# Altium PCB LV1.PCBDOC (part 1 of 2)
Units mm, origin at the board's own origin, x right, y up, seen from the top; angles counter-clockwise.
Board outline 220.06 x 100 mm, 4 copper layers (Component Side, Signal Layer 1, Signal Layer 2, Bottom Layer), stack 0.905 mm thick; 203 components, 130 nets, 643 pads, 1043 vias.
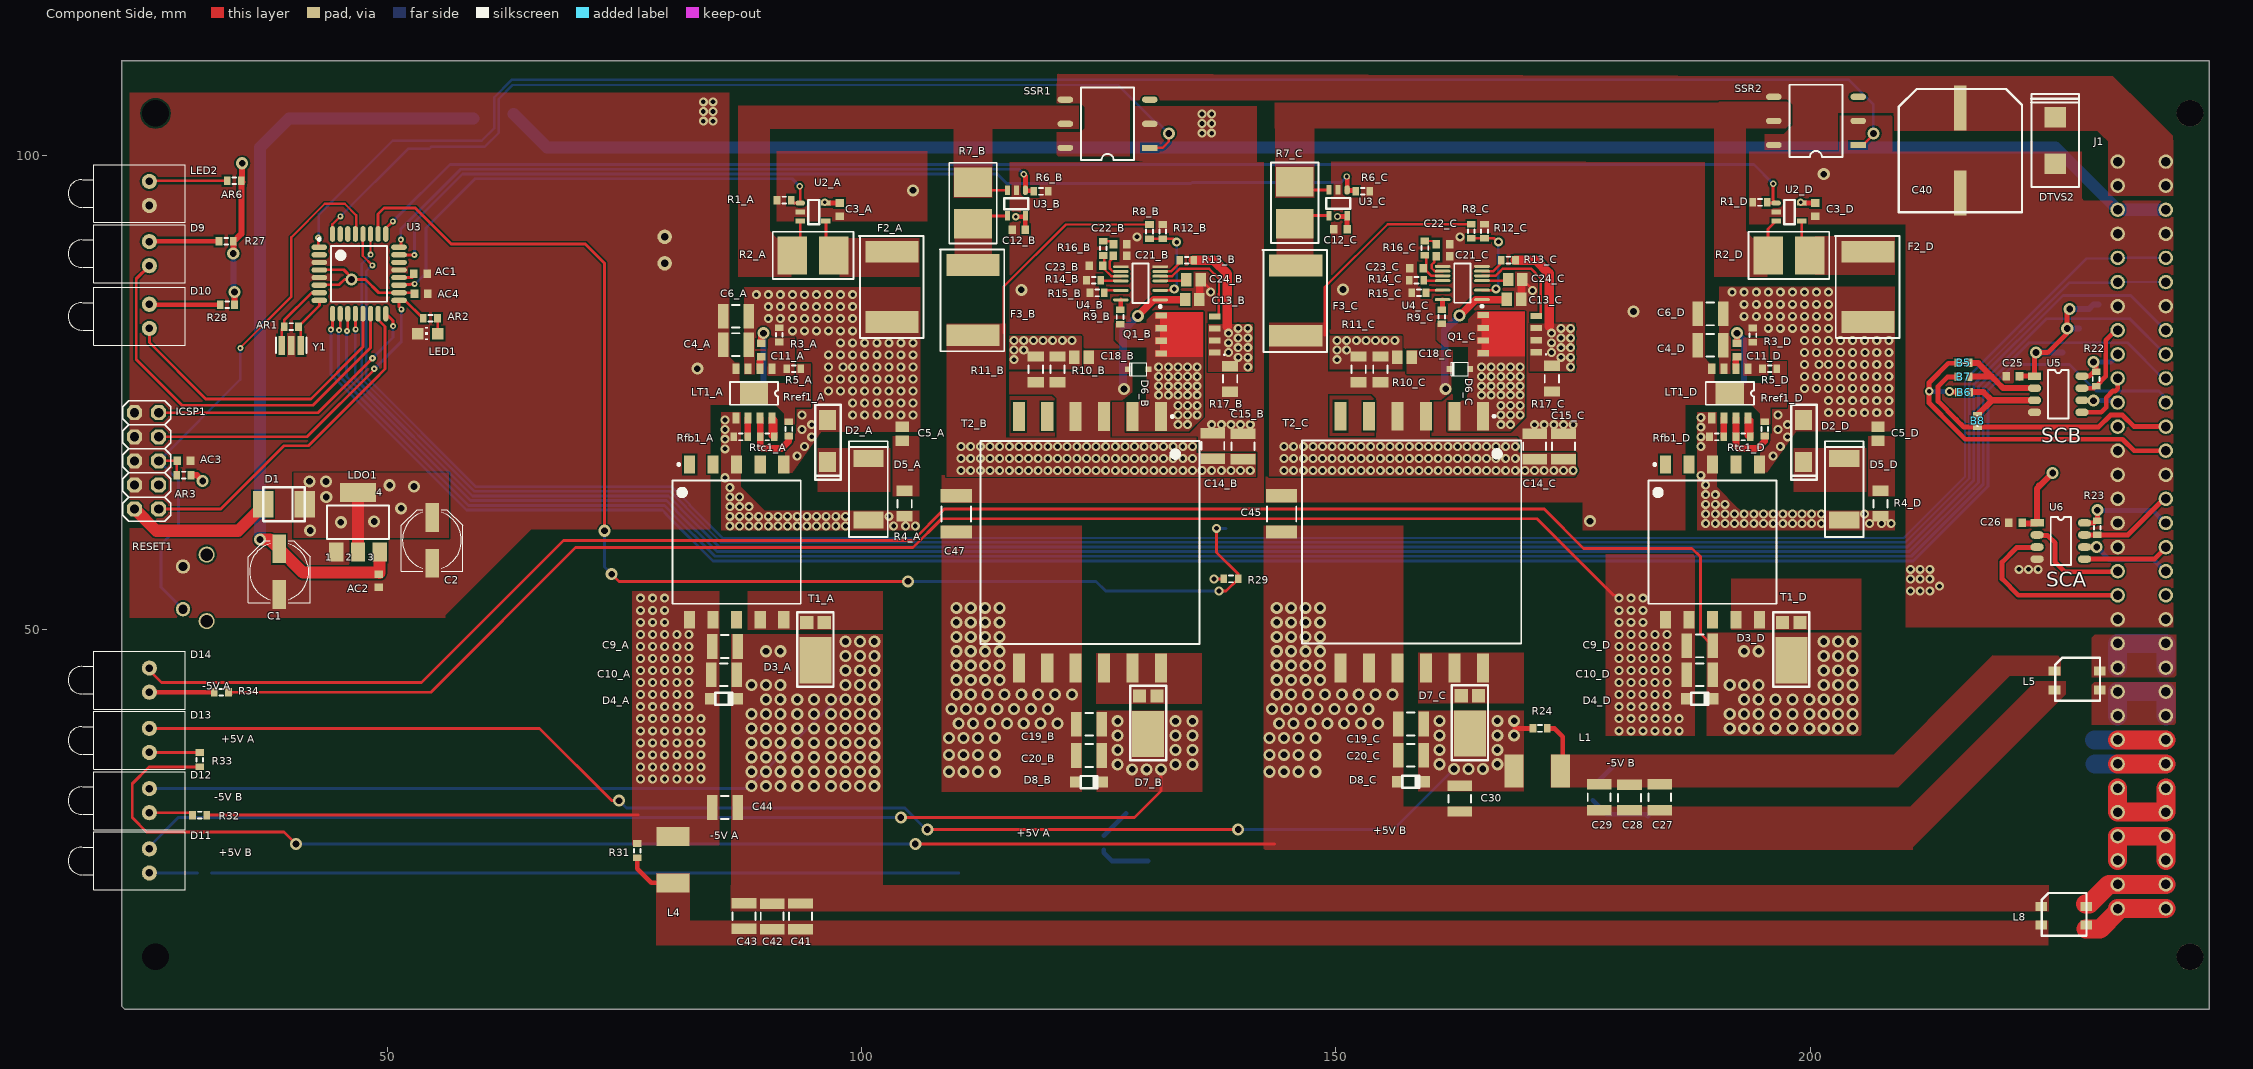
[diagram p0: Component Side view]
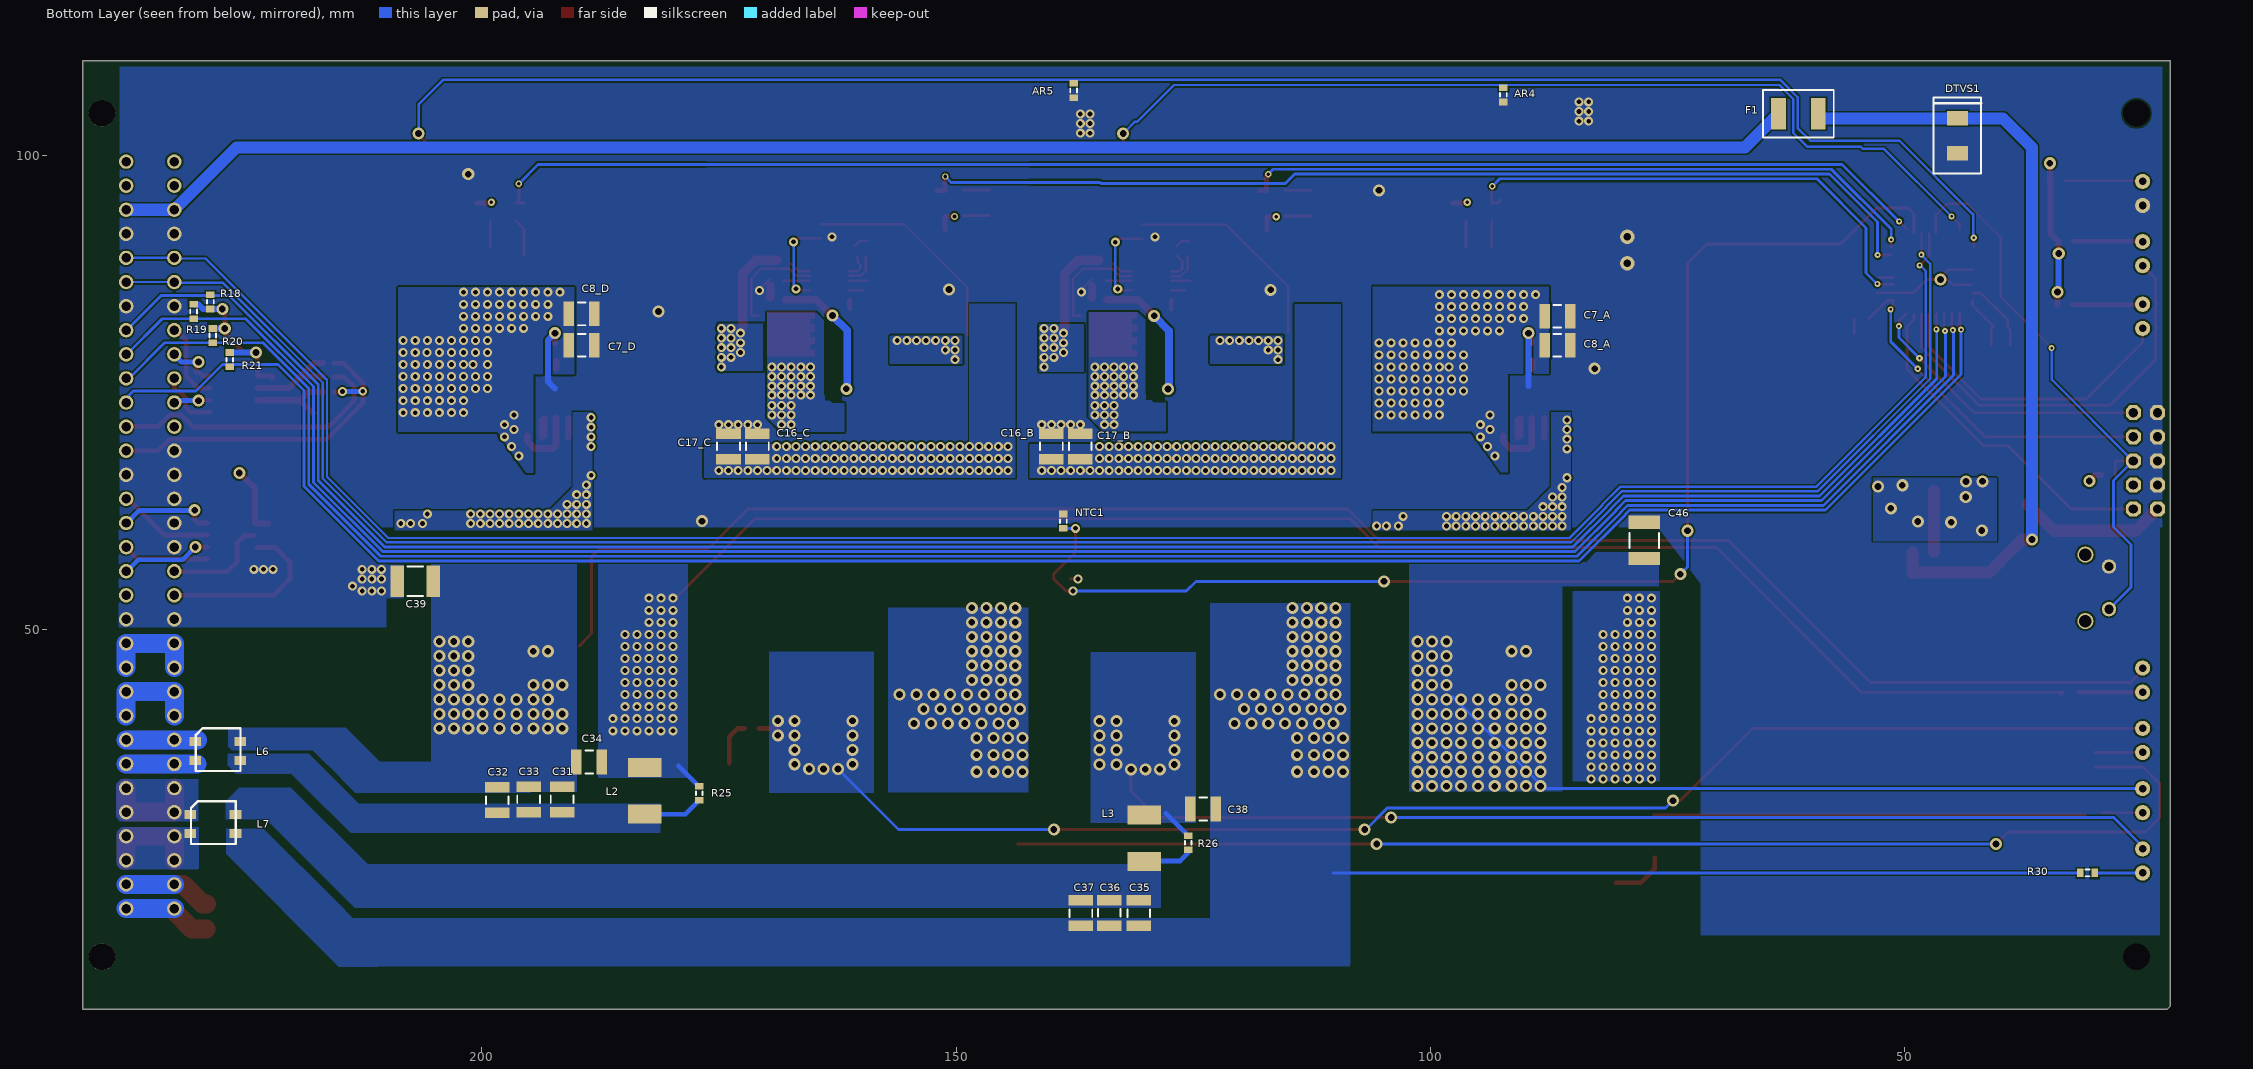
[diagram p1: Bottom Layer view, seen from below]
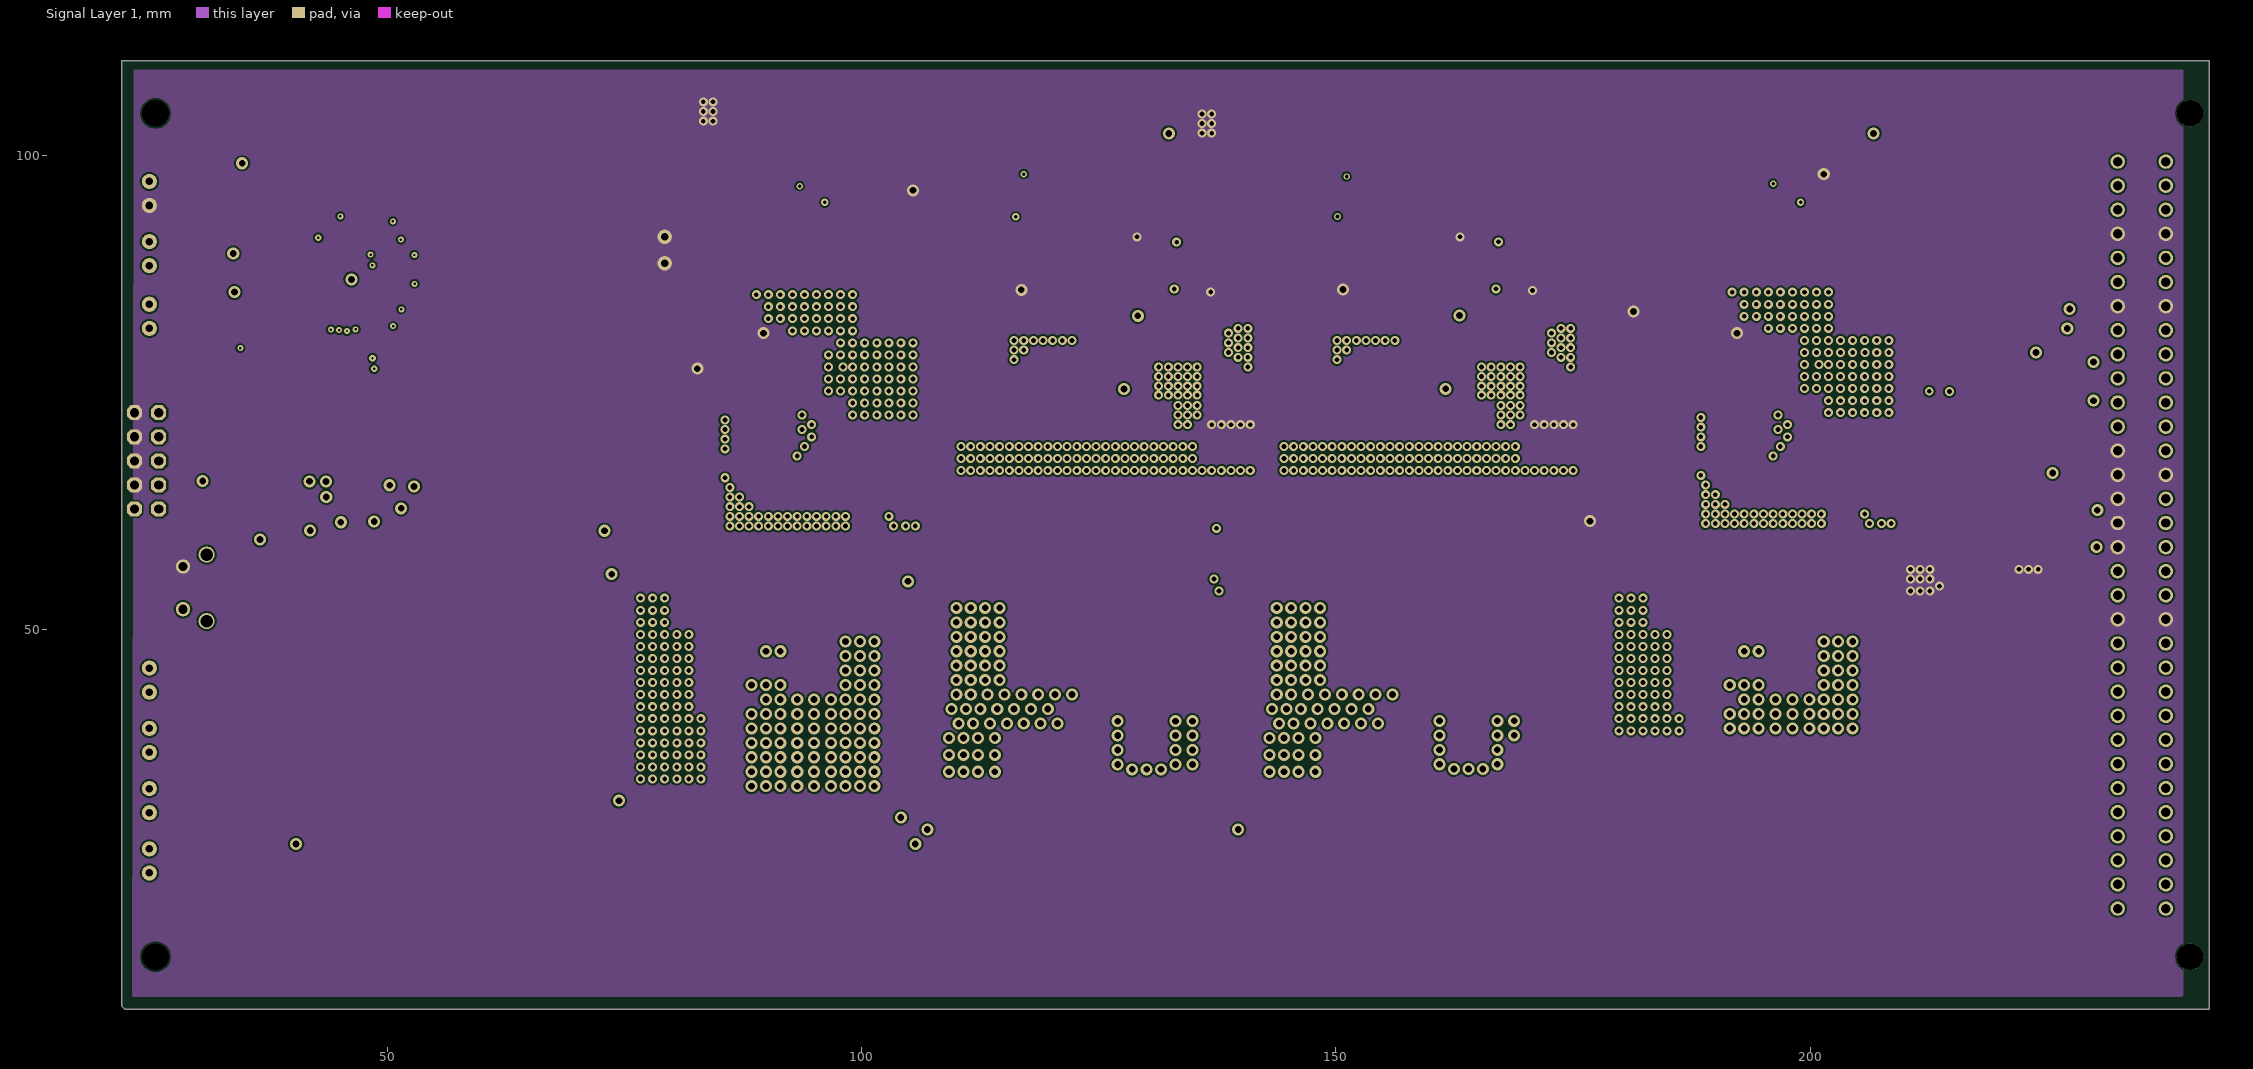
[diagram p2: Signal Layer 1]
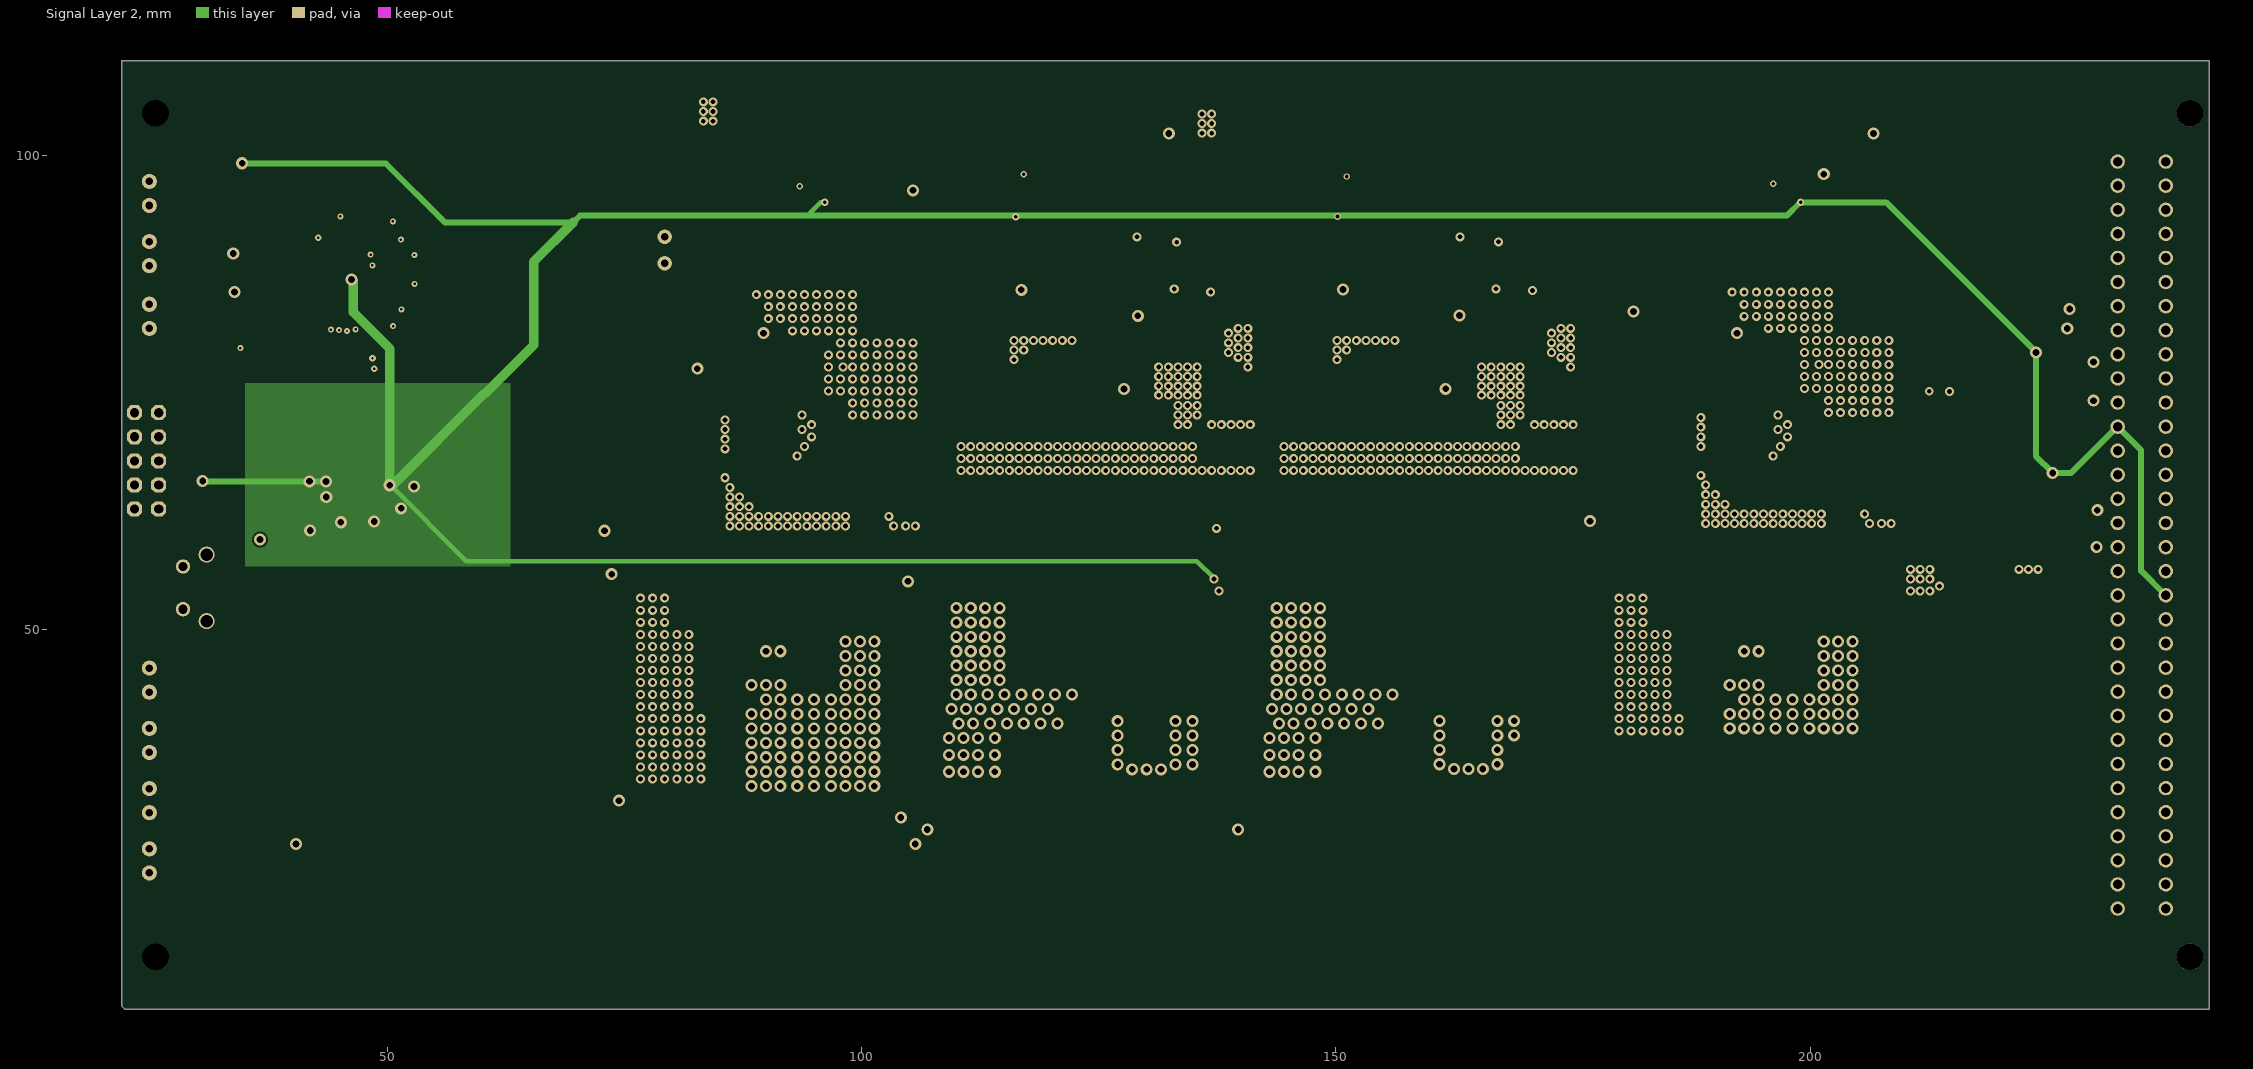
[diagram p3: Signal Layer 2]

## Layer stack, top to bottom
Top Solder: solder mask 0.0102, Solder Resist, Dk 3.5
Component Side: signal copper 0.0356
Dielectric 1: core 0.254, FR-4, Dk 4.2
Signal Layer 1: signal copper 0.036
Dielectric 3: core 0.254, Dk 4.2
Signal Layer 2: signal copper 0.036
Dielectric 4: core 0.254, Dk 4.2
Bottom Layer: signal copper 0.0356
Solder Side: solder mask 0.0102, Solder Resist, Dk 3.5

## Board outline
242.062,110 22.018,110 22,109.982 22,10.414 22,10.352 22.352,10 242.062,10

## Design rules (kind name [scope] priority, off if disabled: settings)
Clearance [InNamedPolygon('GNDtop')] p1: gap=0.2
Clearance Clearance_2 [InNamedPolygon('GNDbottom')] p2: gap=0.2
Clearance Clearance_1 [All] p3: gap=0.2
FabricationTestPointUsage TestPointUsage [All] p1: valid=0 allowmultiple=FALSE
FabricationTestpoint Testpoint [All] p1: side=3 testpointundercomponent=TRUE minsize=1.016 maxsize=2.54 preferedsize=1.524 minholesize=0.508 maxholesize=1.016 preferedholesize=0.813 testpointgrid=0.025 allowsidetop=TRUE allowsidebottom=TRUE usegrid=TRUE gridtolerance=0
PlaneClearance [All] p1: clearance=0.254
PlaneConnect [InNet('GND')] p1: planeconnectstyle=Direct reliefexpansion=0.508 reliefentries=4 reliefconductorwidth=0.254 reliefairgap=0.254
PlaneConnect PlaneConnect_1 [All] p2: planeconnectstyle=Relief reliefexpansion=0.508 reliefentries=4 reliefconductorwidth=0.254 reliefairgap=0.254
PolygonConnect [All] p1: connectstyle=Direct reliefconductorwidth=0.254 reliefentries=4 polygonreliefangle="90 Angle" airgapwidth=0.254
RoomDefinition U_controller [InComponentClass('U_controller')] p1: confinementstyle=ConfineIn formatcopy=TRUE lockcomponents=FALSE outline 93.98,48.768 93.98,110.998 13.716,110.998 13.716,48.768
RoutingVias [All] p1: holewidth=0.254 width=0.508 viastyle="Through Hole" minholewidth=0.254 minwidth=0.508 maxholewidth=0.711 maxwidth=1.27
SilkToSolderMaskClearance SilkscreenOverComponentPads [IsPad] p1: minsilkscreentomaskgap=0.254 clearancetoexposedcopper=TRUE
SolderMaskExpansion [All] p1: expansion=0.051
Width Width_1 [InNet('ISENSE_2') OR InNet('ISENSE_1') OR InNet('NEGISENSE_2') OR InNet('NEGISENSE_1') OR InNet('L_OUT+') OR InNet('L_OUT-') OR InNet('NEGL_OUT+') OR InNet('NEGL_OUT-') OR InNet('SW')] p1: maxlimit=2 minlimit=0.254 preferedwidth=1 midlayer1_maxwidth=0.254 midlayer1_prefwidth=0.254 minimp=50.000000 maximp=50.000000 favimp=50.000000
Width [All] p2: maxlimit=2 minlimit=0.254 preferedwidth=0.254 minimp=50.000000 maximp=50.000000 favimp=50.000000
25 further rules are at their usual default settings.

## Classes and differential pairs
channel class LV2: B C
component class C: C12_C C13_C C14_C C15_C C16_C C17_C C18_C C19_C C20_C C21_C C22 C22_C C23 C23_C C24 C24_C C63 C64 C69 D6_C D7_C D8_C D15 D16 D17 F3_C F5 Q1_C Q2 R6_C R7_C R8_C R9_C R10_C R11_C R12_C R13_C R14_C R15_C R16 R16_C R17 R17_C Rsense3 T2_C T3 U3_C U4 U4_C
component class B: C12_B C13_B C14_B C15_B C16_B C17_B C18_B C19_B C20_B C21_B C22_B C23_B C24_B C48 C50 C52 C53 C55 C56 C58 C59 C62 C65 C66 D6_B D7_B D8_B F2 F3_B Q1 Q1_B Q2 R5 R6 R6_B R7 R7_B R8 R8_B R9 R9_B R10 R10_B R11 R11_B R12 R12_B R13 R13_B R14 R14_B R15 R15_B R16_B R17_B Rsense2 T2 T2_B U3_B U4_B U7 U9
component class U_controller: AC1 AC2 AC3 AC4 AR1 AR2 AR3 AR4 AR5 AR6 C1 C2 C49 C50 D1 D7 DTVS1 F1 F4 F5 ICSP1 LDO1 LED1 LED2 R_pu1 R_pu3 RESET1 RLED1 U3 U7 U9 Y1
component class D: C3_D C4_D C5_D C6_D C7_D C8_D C9_D C10_D C11_D C60 C61 D2_D D3_D D4_D D5_D D15 D16 D17 D18 D19 D20 D21 F2_D F4 LT1_D LT2 Q4 R1_D R2_D R3_D R4_D R5_D R8 R17 Rfb1_D Rfb2 Rref1_D Rref2 Rsense3 Rsense4 Rtc1_D Rtc2 T1_D T3 T4 U2_D
component class A: C3_A C4_A C5_A C6_A C7_A C8_A C9_A C10_A C11_A C51 C67 C68 D2_A D3_A D4_A D5_A D7 D8 F2_A LT1 LT1_A R1_A R2_A R3 R3_A R4 R4_A R5_A R7 Rfb1 Rfb1_A Rref1 Rref1_A Rsense1 Rsense2 Rtc1 Rtc1_A T1 T1_A U2_A
channel class LV1: A B C D
component class Top: *1 B5 B6 B7 B8 C22 C25 C26 C27 C28 C29 C30 C31 C32 C33 C34 C35 C36 C37 C38 C39 C40 C41 C42 C43 C44 C45 C46 C47 C48 C49 C50 C51 C52 C53 C54 C55 C56 C57 C58 C59 C62 C69 D9 D10 D11 D12 D13 D14 DTVS2 J1 L1 L2 L3 L4 L5 L6 L7 L8 NTC1 R18 R19 R20 R21 R22 R23 R24 R25 R26 R27 R28 R29 R30 R31 R32 R33 R34 R_LED3 R_NTC1 RADRS4 SSR1 SSR2 U5 U6 U7 U8
net class ADRS[0..3]: ADRS0 ADRS1 ADRS2 ADRS3

## Components (designator, comment, footprint, x,y, rotation, side; value= is the part's Value field where it differs from the comment)
AC1 "Cap Semi" 1608[0603] 53.5,87.52 r180 top
AC2 "Cap Semi" 1608[0603] 49.09,55.19 r90 top
AC3 "Cap Semi" 1608[0603] 28.56,67.85 r0 top
AC4 "Cap Semi" 1608[0603] 53.57,85.45 r180 top
AR1 "" J1-0603 39.89,81.98 r0 top
AR2 "" J1-0603 54.55,82.85 r180 top
AR3 "pullup" J1-0603 28.56,66.32 r0 top
AR4 "" J1-0603 92.304,106.401 r90 bottom
AR5 "" J1-0603 137.617,106.858 r90 bottom
AR6 "" J1-0603 33.87,97.344 r180 top
B5 "Bridge" Bridge 216.17,78.14 r0 top
B6 "Bridge" Bridge 216.22,75.07 r0 top
B7 "Bridge" Bridge 216.17,76.68 r0 top
B8 "Bridge" Bridge 217.63,72.03 r90 top
C1 "" PANASONIC_D 38.608,56.134 r90 top
C2 "" PANASONIC_D 54.72,59.44 r90 top
C3_A "Cap Semi" 1608[0603] 97.676,94.298 r90 top (schematic designator C3)
C3_D "Cap Semi" 1608[0603] 200.546,94.298 r90 top (schematic designator C3)
C4_A "Cap Semi" C1210 86.754,80.074 r0 top (schematic designator C4)
C4_D "Cap Semi" C1210 189.484,80.01 r0 top (schematic designator C4)
C5_A "Cap Semi" C0805 104.28,70.676 r90 top (schematic designator C5)
C5_D "Cap Semi" C0805 207.15,70.676 r90 top (schematic designator C5)
C6_A "Cap Semi" C1210 86.754,83.058 r0 top (schematic designator C6)
C6_D "Cap Semi" C1210 189.484,83.312 r0 top (schematic designator C6)
C7_A "Cap Semi" C1210 86.614,83.058 r0 bottom (schematic designator C7)
C7_D "Cap Semi" C1210 189.484,80.01 r0 bottom (schematic designator C7)
C8_A "Cap Semi" C1210 86.614,80.01 r0 bottom (schematic designator C8)
C8_D "Cap Semi" C1210 189.484,83.312 r0 bottom (schematic designator C8)
C9_A "Cap Semi" C1210 85.598,48.26 r0 top (schematic designator C9)
C9_D "Cap Semi" C1210 188.354,48.324 r0 top (schematic designator C9)
C10_A "Cap Semi" C1210 85.484,45.276 r0 top (schematic designator C10)
C10_D "Cap Semi" C1210 188.354,45.276 r0 top (schematic designator C10)
C11_A "Cap Semi" 1608[0603] 89.408,79.502 r90 top (schematic designator C11)
C11_D "Cap Semi" 1608[0603] 192.278,79.502 r90 top (schematic designator C11)
C12_B "Cap Semi" 1608[0603] 116.572,92.202 r0 top (schematic designator C12)
C12_C "Cap Semi" 1608[0603] 150.488,92.23 r0 top (schematic designator C12)
C13_B "Cap Semi" C0805 134.86,84.836 r180 top (schematic designator C13)
C13_C "Cap Semi" C0805 168.776,84.864 r180 top (schematic designator C13)
C14_B "Cap Semi" C1210 137.026,69.394 r270 top (schematic designator C14)
C14_C "Cap Semi" C1210 170.942,69.342 r270 top (schematic designator C14)
C15_B "Cap Semi" C1210 140.2,69.342 r270 top (schematic designator C15)
C15_C "Cap Semi" C1210 173.99,69.342 r270 top (schematic designator C15)
C16_B "Cap Semi" C1210 139.954,69.342 r270 bottom (schematic designator C16)
C16_C "Cap Semi" C1210 170.942,69.342 r270 bottom (schematic designator C16)
C17_B "Cap Semi" C1210 136.906,69.342 r270 bottom (schematic designator C17)
C17_C "Cap Semi" C1210 173.99,69.342 r270 bottom (schematic designator C17)
C18_B "Cap Semi" C0805 123.19,78.74 r180 top (schematic designator C18)
C18_C "Cap Semi" C0805 157.226,78.74 r180 top (schematic designator C18)
C19_B "Cap Semi" C1210 123.984,40.063 r0 top (schematic designator C19)
C19_C "Cap Semi" C1210 157.9,40.091 r0 top (schematic designator C19)
C20_B "Cap Semi" C1210 123.984,36.761 r0 top (schematic designator C20)
C20_C "Cap Semi" C1210 157.9,36.789 r0 top (schematic designator C20)
C21_B "Cap Semi" 1608[0603] 127.247,89.46 r180 top (schematic designator C21)
C21_C "Cap Semi" 1608[0603] 161.29,89.408 r180 top (schematic designator C21)
C22_B "Cap Semi" 1608[0603] 127.254,90.678 r180 top (schematic designator C22)
C22_C "Cap Semi" 1608[0603] 161.29,90.678 r180 top (schematic designator C22)
C23_B "Cap Semi" 1608[0603] 124.714,88.392 r0 top (schematic designator C23)
C23_C "Cap Semi" 1608[0603] 158.496,88.138 r0 top (schematic designator C23)
C24_B "Cap Semi" C0805 134.994,86.92 r180 top (schematic designator C24)
C24_C "Cap Semi" C0805 168.91,86.948 r180 top (schematic designator C24)
C25 "Cap Semi" 1608[0603] 221.354,76.749 r0 top
C26 "Cap Semi" 1608[0603] 221.628,61.278 r0 top
C27 "Cap Semi" C1210 184.13,32.36 r90 top
C28 "Cap Semi" C1210 180.94,32.33 r90 top
C29 "Cap Semi" C1210 177.75,32.36 r90 top
C30 "Cap Semi" C1210 163.05,32.21 r90 top
C31 "Cap Semi" C1210 191.53,32.14 r270 bottom
C32 "Cap Semi" C1210 198.36,32.06 r270 bottom
C33 "Cap Semi" C1210 195.06,32.14 r270 bottom
C34 "Cap Semi" C1210 188.68,36.08 r180 bottom
C35 "Cap Semi" C1210 130.74,20.15 r270 bottom
C36 "Cap Semi" C1210 133.85,20.17 r270 bottom
C37 "Cap Semi" C1210 136.85,20.15 r270 bottom
C38 "Cap Semi" C1210 123.97,31.13 r180 bottom
C39 "Cap Semi" 1812 207.01,55.118 r180 bottom
C40 "" EMVY101ARA101MKE0S 215.82,100.52 r90 top
C41 "Cap Semi" C1210 93.57,19.81 r90 top
C42 "Cap Semi" C1210 90.57,19.8 r90 top
C43 "Cap Semi" C1210 87.6,19.83 r90 top
C44 "Cap Semi" C1210 85.59,31.28 r0 top
C45 "Cap Semi" 1812 144.272,62.23 r270 top
C46 "Cap Semi" 1812 77.47,59.436 r270 bottom
C47 "Cap Semi" 1812 109.982,62.23 r270 top
D1 "MBRS130LT3G" SMB-403A 39.116,63.246 r180 top
D2_A "SMAJ30A" DO-214AC 96.406,69.914 r90 top (schematic designator D2)
D2_D "SMAJ30A" DO-214AC 199.276,69.914 r90 top (schematic designator D2)
D3_A "PDS1040L" PDS1040L 95.136,46.8 r180 top (schematic designator D3)
D3_D "PDS1040L" PDS1040L 198.006,46.8 r180 top (schematic designator D3)
D4_A "BZT52H-B5V6" SOD123F 85.484,42.736 r180 top (schematic designator D4)
D4_D "BZT52H-B5V6" SOD123F 188.354,42.736 r180 top (schematic designator D4)
D5_A "ES3B" DO-214AB 100.724,64.834 r270 top (schematic designator D5)
D5_D "ES3B" DO-214AB 203.594,64.834 r270 top (schematic designator D5)
D6_B "BAV20WS" SOD-323 129.151,77.476 r0 top (schematic designator D6)
D6_C "BAV20WS" SOD-323 163.067,77.504 r0 top (schematic designator D6)
D7_B "PDS760-13" PDS1040L 130.207,39.047 r180 top (schematic designator D7)
D7_C "PDS760-13" PDS1040L 164.123,39.075 r180 top (schematic designator D7)
D8_B "BZT52H-B5V6" SOD123F 123.984,33.967 r180 top (schematic designator D8)
D8_C "BZT52H-B5V6" SOD123F 157.9,33.995 r180 top (schematic designator D8)
D9 "LEDYELLOW" LEDYELLOW 24.924,89.662 r180 top
D10 "LEDYELLOW" LEDYELLOW 24.924,83.058 r180 top
D11 "LEDGREEN" LEDGREEN 24.924,25.654 r180 top
D12 "LEDGREEN" LEDGREEN 24.924,32.004 r180 top
D13 "LEDGREEN" LEDGREEN 24.924,38.354 r180 top
D14 "LEDGREEN" LEDGREEN 24.924,44.704 r180 top
DTVS1 "SMBJ10CA" DO-214AA 44.45,102.108 r270 bottom
DTVS2 "SMBJ48A" SMBJ 225.81,101.6 r270 top
F1 "MINISMDC050F-2" MF-MSMF1 61.214,104.394 r180 bottom
F2_A "" MC33192 103.218,86.17 r270 top (schematic designator F2)
F2_D "" MC33192 206.088,86.17 r270 top (schematic designator F2)
F3_B "" MC33192 111.74,84.77 r270 top (schematic designator F3)
F3_C "" MC33192 145.76,84.71 r270 top (schematic designator F3)
ICSP1 "5x2 M" 2X05 24.638,67.818 r90 top
J1 "DIN41612_64WAY" "09 03 164 6919" 234.95,60 r270 top
L1 "Inductor" MPLC0730 171.22,35.14 r0 top
L2 "Inductor" MPLC0730 182.82,33.05 r270 bottom
L3 "Inductor" MPLC0730 130.16,28.05 r270 bottom
L4 "Inductor" MPLC0730 80.12,25.78 r270 top
L5 "TDK_CHOKE" ACMV_TDK 228.14,44.65 r0 top
L6 "TDK_CHOKE" ACMV_TDK 227.83,37.23 r180 bottom
L7 "TDK_CHOKE" ACMV_TDK 228.35,29.53 r180 bottom
L8 "TDK_CHOKE" ACMV_TDK 226.72,19.87 r0 top
LDO1 "LDO_5V" SOT223 46.92,61.35 r0 top
LED1 "GREEN" CHIP-LED0805 54.28,81.23 r90 top
LED2 "LEDRED" LEDRED 24.924,96.012 r180 top
LT1_A "LT8302" S8E 90.564,77.534 r270 top (schematic designator LT1)
LT1_D "LT8302" S8E 193.434,77.534 r270 top (schematic designator LT1)
NTC1 "" J1-0603 138.684,61.468 r270 bottom
Q1_B "BSC320N20NS3 G" INF-PG-TDSON-8-1_V 134.391,81.146 r90 top (schematic designator Q1)
Q1_C "BSC320N20NS3 G" INF-PG-TDSON-8-1_V 168.307,81.174 r90 top (schematic designator Q1)
R1_A "Res3" J1-0603 91.834,95.314 r0 top (schematic designator R1)
R1_D "Res3" J1-0603 194.704,95.06 r0 top (schematic designator R1)
R2_A "Rsense" R6432 94.882,89.472 r0 top (schematic designator R2)
R2_D "Rsense" R6432 197.752,89.472 r0 top (schematic designator R2)
R3_A "Res3" J1-0603 91.313,81.102 r90 top (schematic designator R3)
R3_D "Res3" J1-0603 193.954,81.077 r90 top (schematic designator R3)
R4_A "Res3" C1206 104.534,63.31 r90 top (schematic designator R4)
R4_D "Res3" C1206 207.404,63.31 r90 top (schematic designator R4)
R5_A "Res3" J1-0603 92.85,77.534 r180 top (schematic designator R5)
R5_D "Res3" J1-0603 195.72,77.534 r180 top (schematic designator R5)
R6_B "Res3" J1-0603 118.916,96.22 r180 top (schematic designator R6)
R6_C "Res3" J1-0603 152.832,96.248 r180 top (schematic designator R6)
R7_B "Rsense" R6432 111.746,94.996 r270 top (schematic designator R7)
R7_C "Rsense" R6432 145.662,95.024 r270 top (schematic designator R7)
R8_B "Res3" J1-0603 130.35,91.99 r90 top (schematic designator R8)
R8_C "Res3" J1-0603 164.266,92.018 r90 top (schematic designator R8)
R9_B "Res3" J1-0603 127.247,82.983 r270 top (schematic designator R9)
R9_C "Res3" J1-0603 161.163,83.011 r270 top (schematic designator R9)
R10_B "Res3" C1206 120.65,77.47 r90 top (schematic designator R10)
R10_C "Res3" C1206 154.686,77.47 r90 top (schematic designator R10)
R11_B "Res3" C1206 118.364,77.47 r90 top (schematic designator R11)
R11_C "Res3" C1206 152.4,77.47 r90 top (schematic designator R11)
R12_B "Res3" J1-0603 131.747,91.99 r270 top (schematic designator R12)
R12_C "Res3" J1-0603 165.663,92.018 r270 top (schematic designator R12)
R13_B "Res3" J1-0603 134.271,88.958 r180 top (schematic designator R13)
R13_C "Res3" J1-0603 168.187,88.986 r180 top (schematic designator R13)
R14_B "Res3" J1-0603 124.46,86.868 r0 top (schematic designator R14)
R14_C "Res3" J1-0603 158.496,86.868 r0 top (schematic designator R14)
R15_B "Res3" J1-0603 124.834,85.523 r180 top (schematic designator R15)
R15_C "Res3" J1-0603 158.75,85.551 r180 top (schematic designator R15)
R16_B "Res3" J1-0603 125.469,90.222 r270 top (schematic designator R16)
R16_C "Res3" J1-0603 159.385,90.25 r270 top (schematic designator R16)
R17_B "Res3" C1206 138.851,76.456 r90 top (schematic designator R17)
R17_C "Res3" C1206 172.767,76.484 r90 top (schematic designator R17)
R18 "Res3" J1-0603 228.6,84.582 r90 bottom
R19 "Res3" J1-0603 230.378,83.566 r270 bottom
R20 "Res3" J1-0603 228.346,81.026 r270 bottom
R21 "Res3" J1-0603 226.568,78.486 r270 bottom
R22 "" J1-0603 230.124,76.454 r270 top
R23 "" J1-0603 230.264,60.77 r90 top
R24 "Res3" J1-0603 171.52,39.62 r180 top
R25 "Res3" J1-0603 177.07,32.79 r270 bottom
R26 "Res3" J1-0603 125.54,27.57 r270 bottom
R27 "Res3" J1-0603 33.02,90.983 r0 top
R28 "Res3" J1-0603 33.147,84.277 r0 top
R29 "" J1-0603 138.938,55.372 r180 top
R30 "Res3" J1-0603 30.734,24.384 r0 bottom
R31 "Res3" J1-0603 76.36,26.73 r90 top
R32 "Res3" J1-0603 30.226,30.48 r0 top
R33 "Res3" J1-0603 30.226,36.322 r270 top
R34 "Res3" J1-0603 32.512,43.434 r0 top
RESET1 "PB_RST" 1-1825027-4 29.718,54.436 r270 top
Rfb1_A "Res3" J1-0603 87.262,70.339 r180 top (schematic designator Rfb1)
Rfb1_D "Res3" J1-0603 190.132,70.339 r180 top (schematic designator Rfb1)
Rref1_A "Res3" J1-0603 92.342,71.184 r90 top (schematic designator Rref1)
Rref1_D "Res3" J1-0603 195.212,71.184 r90 top (schematic designator Rref1)
Rtc1_A "Res3" J1-0603 90.056,70.339 r180 top (schematic designator Rtc1)
Rtc1_D "Res3" J1-0603 192.926,70.339 r180 top (schematic designator Rtc1)
SSR1 "LCA701" LCA701S 130.378,100.813 r180 top
SSR2 "LCA701" LCA701S 205.054,101.117 r180 top
T1_A "36V" EP13 86.834,59.258 r90 top (schematic designator T1)
T1_D "36V" EP13 189.704,59.258 r90 top (schematic designator T1)
T2_B "750311597" EFD20 124.072,59.234 r270 top (schematic designator T2)
T2_C "750311597" EFD20 157.988,59.262 r270 top (schematic designator T2)
U2_A "INA138" SOT-23 94.882,94.044 r270 top (schematic designator U2)
U2_D "INA138" SOT-23 197.752,94.044 r270 top (schematic designator U2)
U3 "ATmega328P-AU" 32A_N 47.04,87.54 r0 top
U3_B "INA138" SOT-23 116.318,94.996 r180 top (schematic designator U3)
U3_C "INA138" SOT-23 150.234,95.024 r180 top (schematic designator U3)
U4_B "LT3748IMS#PBF" LT-MS-16-4PR_N 129.406,86.539 r180 top (schematic designator U4)
U4_C "LT3748IMS#PBF" LT-MS-16-4PR_N 163.322,86.567 r180 top (schematic designator U4)
U5 "ADM4855ARZ" SOICN8 223.64,76.749 r0 top
U6 "ADM4855ARZ" SOICN8 223.914,61.278 r0 top
Y1 "" RESONATOR 39.89,80 r180 top

## Footprints (in the part's own frame and the unit in brackets; to place one, negate y for a bottom-side part, rotate by r counter-clockwise, add the part's x,y. Pads: shape width x height; smd on the part's side, far side on the other; paste and mask are expansions set on the pad)
1-1825027-4 [mm]
  round 1.7 hole 1.3: 0(-3.505,1.245) 0(3.505,1.245)
  round 1.524 hole 0.99: 1(-2.25,-1.245) 2(2.25,-1.245)
  body extent -4.2,-7.37 4.2,2.78, height 7
2X05 [mil]
  oct 62x62 hole 38: 1(-200,-50) 2(-200,50) 3(-100,-50) 4(-100,50) 5(0,-50) 6(0,50) 7(100,-50) 8(100,50) 9(200,-50) 10(200,50)
  silkscreen extent -250,-100 250,100
"09 03 164 6919" [mil]
  round 110.24 hole 110.24: 0(-1750,200) 0(1750,200)
  round 60 hole 39.37: 0(-1550,100) 1(-1450,100) 2(-1350,100) 3(-1250,100) 4(-1150,100) 5(-1050,100) 6(-950,100) 7(-850,100) 8(-750,100) 9(-650,100) 10(-550,100) 11(-450,100) 12(-350,100) 13(-250,100) 14(-150,100) 15(-50,100) 16(50,100) 17(150,100) 18(250,100) 19(350,100) 20(450,100) 21(550,100) 22(650,100) 23(750,100) 24(850,100) 25(950,100) 26(1050,100) 27(1150,100) 28(1250,100) 29(1350,100) 30(1450,100) 31(1550,100) 32(-1550,-100) 33(-1450,-100) 34(-1350,-100) 35(-1250,-100) 36(-1150,-100) 37(-1050,-100) 38(-950,-100) 39(-850,-100) 40(-750,-100) 41(-650,-100) 42(-550,-100) 43(-450,-100) 44(-350,-100) 45(-250,-100) 46(-150,-100) 47(-50,-100) 48(50,-100) 49(150,-100) 50(250,-100) 51(350,-100) 52(450,-100) 53(550,-100) 54(650,-100) 55(750,-100) 56(850,-100) 57(950,-100) 58(1050,-100) 59(1150,-100) 60(1250,-100) 61(1350,-100) 62(1450,-100) 63(1550,-100)
  body extent -1850,-100 1851,609, height 368
32A_N [mm] "Thin QFP, 32-Leads, Body 7x7mm, Pitch 0.8mm, IPC Medium Density"
  oval 1.65x0.55 smd: 1(-4.2,2.8) 2(-4.2,2) 3(-4.2,1.2) 4(-4.2,0.4) 5(-4.2,-0.4) 6(-4.2,-1.2) 7(-4.2,-2) 8(-4.2,-2.8) 17(4.2,-2.8) 18(4.2,-2) 19(4.2,-1.2) 20(4.2,-0.4) 21(4.2,0.4) 22(4.2,1.2) 23(4.2,2) 24(4.2,2.8)
  oval 0.55x1.65 smd: 9(-2.8,-4.2) 10(-2,-4.2) 11(-1.2,-4.2) 12(-0.4,-4.2) 13(0.4,-4.2) 14(1.2,-4.2) 15(2,-4.2) 16(2.8,-4.2) 25(2.8,4.2) 26(2,4.2) 27(1.2,4.2) 28(0.4,4.2) 29(-0.4,4.2) 30(-1.2,4.2) 31(-2,4.2) 32(-2.8,4.2)
  silkscreen extent -4.32,-2.95 2.95,3.75, body extent -3.5,-3.5 3.5,3.5, height 1.2
1608[0603] [mm] "Chip Capacitor, Body 1.6x0.8mm, IPC High Density"
  rect 0.8x0.9 smd: 1(-0.7,0) 2(0.7,0)
  body extent -0.87,-0.48 0.87,0.48, height 1.3
1812 [mm] "Chip Capacitor, Body 4.5x3.2mm, IPC High Density"
  rect 1.4x3.3 smd: 1(-1.9,0) 2(1.9,0)
  silkscreen extent -0.8,-1.55 0.8,1.55, body extent -2.4,-1.7 2.4,1.7, height 1.4
ACMV_TDK [mm]
  rect 1.25x0.95 smd: 1(-2.375,1) 2(-2.375,-1) 3(2.375,-1) 4(2.375,1)
  silkscreen extent -2.3,-2.1 2.4,2.4, body extent -2.4,-2.1 2.5,2.5, height 2
Bridge [mm]
  rect 0.7x0.9 smd: 1(-0.6,0) 2(0.6,0)
C0805 [mm] "Chip Capacitor, Body 2.0x1.3mm, IPC High Density"
  rect 1.1x1.4 smd: 1(-0.75,0) 2(0.75,0)
  body extent -1.1,-0.72 1.1,0.72, height 1.4
C1206 [mm] "Chip Capacitor, Body 3.2x1.6mm, IPC High Density"
  rect 1.1x1.7 smd: 1(-1.35,0) 2(1.35,0)
  silkscreen extent -0.4,-0.75 0.4,0.75, body extent -1.7,-0.9 1.7,0.9, height 1.3
C1210 [mm] "Chip Capacitor, Body 3.2x2.5mm, IPC High Density"
  rect 1.1x2.6 smd: 1(-1.35,0) 2(1.35,0)
  silkscreen extent -0.4,-1.2 0.4,1.2, body extent -1.7,-1.35 1.7,1.35, height 1.3
CHIP-LED0805 [mil]
  rect 48x48 smd: A(0,-41.34) C(0,42)
  silkscreen extent -27,0 27,12
DO-214AA [mm]
  rect 1.52x2.18 smd: 1(-1.84,0) 2(1.84,0)
  silkscreen extent -4.01,-2.5 4.01,2.5
DO-214AB [mm]
  rect 1.8x3.2 smd: 1(-3.25,0) 2(3.25,0)
  silkscreen extent -5.05,-2.03 5.05,2.03
DO-214AC [mm]
  rect 2.1x1.8 smd: 1(2.2,0) 2(-2.2,0)
  silkscreen extent -4.06,-1.4 3.81,1.27
EFD20 [mm] "SMD, 10-Leads, Body 22.0x20.0mm (max), Pitch 3.75mm, IPC Medium Density"
  rect 3.05x1.27 smd: 1(-13.26,7.5) 2(-13.26,4.5) 3(-13.26,1.5) 4(-13.26,-1.5) 5(-13.26,-4.5) 6(-13.26,-7.5) 7(13.26,-7.5) 8(13.26,-4.5) 9(13.26,-1.5) 10(13.26,1.5) 11(13.26,4.5) 12(13.26,7.5)
  silkscreen extent -13.38,-11.55 10.7,11.55, body extent -14.54,-10 14.54,10, height 11.43
EMVY101ARA101MKE0S [mm]
  rect 4.75x1.3 smd: 1(4.475,0) 2(-4.475,0)
  silkscreen extent -6.5,-6.5 6.5,6.5
EP13 [mm] "SMD, 10-Leads, Body 13.5x14.0mm (max), Pitch 2.48mm, IPC Medium Density"
  rect 1.88x1.17 smd: 1(8.18,4.96) 2(8.18,2.48) 3(8.18,0) 4(8.18,-2.48) 5(8.18,-4.96) 6(-8.18,-4.96) 7(-8.18,-2.48) 8(-8.18,0) 9(-8.18,2.48) 10(-8.18,4.96)
  silkscreen extent -6.5,-6.75 8.3,6.75, body extent -8.88,-6.75 8.87,6.75, height 12.5
INF-PG-TDSON-8-1_V [mm] "TDSON, 8-Leads, Body 6.15x5.15mm, Pitch 1.27mm"
  rect 0.65x1.2 smd: 1(-1.905,-2.825) 2(-0.635,-2.825) 3(0.635,-2.825) 4(1.905,-2.825) 5(2.007,2.794) 6(0.66,2.794) 7(-0.66,2.794) 8(-2.007,2.794)
  Component Side region: -2.35,2.925 -2.35,-1.575 2.35,-1.575 2.35,2.925
  Component Side region: -2.35,2.925 -1.65,2.925 -1.65,3.425 -2.35,3.425
  Component Side region: 1.65,2.925 2.35,2.925 2.35,3.425 1.65,3.425
  Component Side region: -1.015,2.925 -0.315,2.925 -0.315,3.425 -1.015,3.425
  Component Side region: 0.315,2.925 1.015,2.925 1.015,3.425 0.315,3.425
  silkscreen extent -2.23,-3.94 -2.03,-3.74, body extent -2.58,-3.08 2.58,3.08, height 1
J1-0603 [mm] "Chip Resistor, Body 1.6x0.8mm, IPC High Density"
  rect 0.7x0.9 smd: 1(-0.75,0) 2(0.75,0)
  silkscreen extent -0.2,-0.35 0.2,0.35, body extent -0.85,-0.48 0.85,0.48, height 0.9
LCA701S [mm]
  rect 1.65x0.65 smd: 1(0,0)
  oval 1.65x0.65 smd: 2(0,-2.54) 3(0,-5.08) 4(8.9,-5.08) 5(8.9,-2.54) 6(8.9,0)
  silkscreen extent 1.66,-6.35 7.24,1.27
LEDGREEN [mm] "LED; 2 Leads"
  round 1.6 hole 0.8: 1(0,1.27) 2(0,-1.27)
  silkscreen extent -3.81,-3.05 8.56,3.05, body extent -3.76,-3.05 8.64,2.92, height 5.97
LEDRED [mm] "LED; 2 Leads"
  round 1.6 hole 0.8: 1(0,1.27) 2(0,-1.27)
  silkscreen extent -3.81,-3.05 8.56,3.05, body extent -3.76,-3.05 8.64,2.92, height 5.97
LEDYELLOW [mm] "LED; 2 Leads"
  round 1.6 hole 0.8: 1(0,1.27) 2(0,-1.27)
  silkscreen extent -3.81,-3.05 8.56,3.05, body extent -3.76,-3.05 8.64,2.92, height 5.97
LT-MS-16-4PR_N [mm] "SOP, 12-Leads, Body 4.1x3.1mm, Pitch 0.5mm, IPC Medium Density"
  oval 1.65x0.3 smd: 1(-2.075,1.75) 3(-2.075,0.75) 5(-2.075,-0.25) 6(-2.075,-0.75) 7(-2.075,-1.25) 8(-2.075,-1.75) 9(2.075,-1.75) 10(2.075,-1.25) 11(2.075,-0.75) 12(2.075,-0.25) 14(2.075,0.75) 16(2.075,1.75)
  silkscreen extent -2.2,-2.08 0.85,2.57, body extent -1.55,-2.05 1.55,2.05, height 1.1
MC33192 [mm]
  rect 2.3x5.6 smd: 1(-3.7,0) 2(3.7,0)
  silkscreen extent -5.35,-3.5 5.4,3.3
MF-MSMF1 [mm]
  rect 1.55x3.3 smd: 1(-2.1,0) 2(2.1,0)
  silkscreen extent -3.73,-2.5 3.73,2.5
MPLC0730 [mm]
  rect 2x3.5 smd: 1(2.45,0) 2(-2.45,0)
  body extent -3.18,-2.67 3.17,2.79, height 2
PANASONIC_D [mil]
  rect 119x56 smd: 1(95,0) 2(-94.49,0)
  silkscreen extent -128,-128 128,128, body extent -130,-125 125,125, height 236
PDS1040L [mm]
  rect 1.39x1.4 smd: 1(-0.92,-3.982) 1(0.92,-3.982)
  rect 3.36x4.86 smd: 2(0,0)
  silkscreen extent -1.9,-5.08 1.91,2.79, body extent -1.52,-4.06 1.52,2.29, height 1
R6432 [mm]
  rect 3.1x4 smd: 1(-2.2,0) 2(2.2,0)
  silkscreen extent -4.25,-2.5 4.25,2.5
RESONATOR [mil]
  rect 28x79 smd: 1(-39.37,0) 2(0,0) 3(40,0)
  silkscreen extent -63,-31 63,32
S8E [mil]
  rect 45x30 smd: 1(0,0) 2(0,-50) 3(0,-100) 4(0,-150) 5(205,-150) 6(205,-100) 7(205,-50) 8(205,0)
  rect 89x118 smd: 4(102.5,-75)
  silkscreen extent 55,-175 149,25
SMB-403A [mm]
  rect 2.159x2.743 smd: 1(-2.21,0) 2(2.21,0)
  silkscreen extent -2.2,-1.8 2.2,1.8, body extent -2.1,-1.9 2.3,1.7, height 2
SMBJ [mm]
  rect 2.16x2.26 smd: 1(-2.45,0) 2(2.45,0)
  silkscreen extent -4.9,-2.5 4.9,2.5
SOD123F [mm]
  rect 1.2x1.2 smd: 1(-1.4,0) 2(1.4,0)
  silkscreen extent -1.02,-0.63 0.89,0.64
SOD-323 [mm]
  rect 0.6x0.6 smd: 1(-1.1,0) 2(1.1,0)
  silkscreen extent -0.9,-0.7 0.9,0.7
SOICN8 [mm]
  rect 1.4x0.8 smd: 1(0,0)
  oval 1.4x0.8 smd: 2(0,-1.27) 3(0,-2.54) 4(0,-3.81) 5(5,-3.81) 6(5,-2.54) 7(5,-1.27) 8(5,0)
  silkscreen extent 1.43,-4.44 3.56,0.64, body extent -0.38,-4.7 5.46,0.89, height 1
SOT223 [mm]
  rect 1.5x2 smd: 1(-2.3,-3.15) 2(0,-3.15) 3(2.3,-3.15)
  rect 3.8x2 smd: 4(0,3.15)
  silkscreen extent -3.28,-1.78 3.28,1.78, body extent -3.3,-4.2 3.3,4.2, height 1
SOT-23 [mm]
  oval 0.55x1 smd: 1(-0.95,-1.35)
  rect 0.55x1 smd: 2(0,-1.35) 3(0.95,-1.35) 4(0.95,1.35) 5(-0.95,1.35)
  silkscreen extent -1.27,-0.51 1.27,0.63

## Part data
AC1 AC2 AC3 AC4 C3_A C3_D C4_A C4_D C5_A C5_D C6_A C6_D C7_A C7_D C8_A C8_D C9_A C9_D C10_A C10_D C11_A C11_D C12_B C12_C C13_B C13_C C14_B C14_C C15_B C15_C C16_B C16_C C17_B C17_C C18_B C18_C C19_B C19_C C20_B C20_C C21_B C21_C C22_B C22_C C23_B C23_C C24_B C24_C C25 C26 C27 C28 C29 C30 C31 C32 C33 C34 C35 C36 C37 C38 C39 C41 C42 C43 C44 C45 C46 C47: "Capacitor (Semiconductor SIM Model)"
AR1 AR2 AR3 AR4 AR5 AR6 NTC1 R22 R23 R29: library part Res3, "Resistor"
C1 C2 C40: library part CPOL-EUD
D1 D5_A D5_D D6_B D6_C: "Power Diode"
D2_A D2_D: library part "D Zener", "Zener Diode"
D3_A D3_D: "Schottky Diode"
D4_A D4_D D8_B D8_C: "Zener Diode"
D7_B D7_C: library part PDS1040L, "Schottky Diode"
DTVS1 DTVS2: library part SMBJ, "TVS"
F1 F2_A F2_D F3_B F3_C: library part "Fuse 1", "Fuse"
ICSP1: library part PINHD-2X5
LED1: library part LEDCHIP-LED0805
Q1_B Q1_C: "N-Channel OptiMOS 3 Power-Transistor, 200 V VDS, 36 A ID, -55 to 150 degC, PG-TDSON-8-1, Reel, Green"
R1_A R1_D R3_A R3_D R4_A R4_D R5_A R5_D R6_B R6_C R8_B R8_C R9_B R9_C R10_B R10_C R11_B R11_C R12_B R12_C R13_B R13_C R14_B R14_C R15_B R15_C R16_B R16_C R17_B R17_C R18 R19 R20 R21 R24 R25 R26 R27 R28 R30 R31 R32 R33 R34 Rfb1_A Rfb1_D Rref1_A Rref1_D Rtc1_A Rtc1_D: "Resistor"
R2_A R2_D R7_B R7_C: "CRF2512-FV-R001ELF"
T1_A T1_D: library part "WE-FB, 750311457", "Flyback Transformer suitable or LT3573/ LT3574/ LT3575/ LT3748 WE-FB, Ui=36V"
T2_B T2_C: "Flyback Transformer suitable or LT3573/ LT3574/ LT3575/ LT3748 WE-FB, Ui=20-48V"
U3: "8-bit AVR Microcontroller, 32KB Flash, 1KB EEPROM, 2KB SRAM, 32-pin TQFP, Industrial Grade (-40°C to 85°C)"
U4_B U4_C: "Isolated Flyback Controller, 16-pin SOP (MS-16), -40 to 125 degC, Pb-Free"
U5 U6: library part SP3084EEN-L
Y1: library part RESONATORMU

## Free pads (board coordinates)
  round 2.6 hole 2.8: 2(25.57,15.549) 2(25.57,104.444)
  round 1.524 hole 0.762: 3(79.248,91.44) 4(79.248,88.646)

## Via types
v1: diameter 0.95, hole 0.5, Component Side to Bottom Layer, 704 vias
v2: diameter 1.27, hole 0.711, Component Side to Bottom Layer, 313 vias
v3: diameter 0.635, hole 0.254, Component Side to Bottom Layer, 14 vias
v4: diameter 0.672, hole 0.381, Component Side to Bottom Layer, 4 vias
v5: diameter 0.762, hole 0.381, Component Side to Bottom Layer, 4 vias
v6: diameter 0.7, hole 0.254, Component Side to Bottom Layer, 3 vias
v7: diameter 0.9, hole 0.5, Component Side to Bottom Layer, 1 vias

## Nets (pads, with @x,y where several pads share a name; then routed paths per layer and width w, separated by ;. In a path a pad name is that pad's centre, name@x,y a point inside that pad or via, vN(x,y) a via of type N, cw(c..) or ccw(c..) an arc to the next point about the centre after c; other vN are vias at no path point)
32V: C40.1 DTVS2.1 J1.0@237.49,99.37 J1.1 J1.32 J1.33 SSR1.4 SSR1.6 SSR2.4 SSR2.6
+5V: AC4.2 AR3.2 AR6.1 C2.1 C3_A.2 C3_D.2 C12_B.2 C12_C.2 C25.2 C26.2 D1.1 J1.18 J1.43 LDO1.2 LDO1.4 R18.1 R19.1 R20.1 R21.1 R27.2 R28.2 R29.2 U2_A.5 U2_D.5 U3.4 U3.6 U3.18 U3_B.5 U3_C.5 U5.1 U6.1 | length 479.2
  Component Side w0.3: U3.4@42.88,87.96 45.42,87.96 46.23,87.15 v2(46.23,86.95) ; U3.6@42.95,86.38 44.91,86.38 45.48,86.95 v2(46.23,86.95) ; U3.18@51.23,85.54 49.11,85.54 47.7,86.95 v2(46.23,86.95)
  Component Side w0.305: U3.18@51.24,85.54 AC4.2@52.86,85.54 ; v1(137.16,55.372) R29.2@137.922,55.372
  Component Side w0.5: U2_A.5@96.232,94.994 C3_A.2@97.672,94.994 ; v5(116.249,93.553) U3_B.5@117.229,93.553 ; C12_B.2@117.263,92.147 U3_B.5@117.263,93.587 ; v5(150.165,93.581) U3_C.5@151.145,93.581 ; C12_C.2@151.179,92.175 U3_C.5@151.179,93.615 ; v5(198.984,95.072) 199.098,94.988 199.136,94.96 U2_D.5@199.102,94.994 C3_D.2@200.542,94.994 ; v2(223.786,79.236) 225.032,79.236 227.076,81.28 v2@227.076,83.566
  Component Side w0.508: C25.2@222.054,76.498 C25.2@222.054,76.749 U5.1@223.64,76.749 v2@223.64,79.13 ; 224.028,65.024 224.028,65.278
  Component Side w0.635: AR3.2@29.31,66.32 29.94,66.32 v2@30.55,65.71 ; v2(33.77,89.675) R27.2@33.77,90.895 ; R27.2@33.77,90.983 R27.2@33.77,90.895 ; R28.2@33.897,84.277 v2(33.897,85.61) ; AR6.1@34.712,97.362 v2(34.712,99.194) ; AR6.1@34.734,97.23 AR6.1@34.62,97.344 34.62,91.745 R27.2@33.77,90.895 ; C26.2@222.504,61.214 223.85,61.214 U6.1@223.914,61.278 223.914,64.91 224.028,65.024 v2(225.552,66.548)
  Component Side w1.27: LDO1.2@46.92,58.2 LDO1.4@46.92,64.62
  Signal Layer 2 w0.5: v2@50.292,65.278 58.32,57.25 135.33,57.25 v1@137.21,55.37 ; 94.27,93.67 95.672,95.072 v5(96.114,95.072)
  Signal Layer 2 w0.635: v2@30.51,65.65 v2(43.55,65.65) ; v2@34.68,99.17 49.86,99.17 56.066,92.964 69.614,92.964 70.32,93.67 94.27,93.67 197.53,93.67 v5@198.97,95.11 ; v5(198.984,95.072) 207.998,95.072 v2@223.75,79.32 ; v2(223.786,79.236) 223.786,68.314 v2(225.552,66.548) 227.508,66.548 J1.43@232.43,71.47 ; J1.43@232.41,71.43 234.88,68.96 234.88,56.22 J1.18@237.5,53.6
  Signal Layer 2 w1: v2@46.42,86.75 46.42,83.5 50.26,79.66 v2(50.26,65.25) ; v2@50.292,65.278 50.598,65.278 60.21,74.89 ; 60.338,74.932 65.44,80.034 65.44,88.82 69.584,92.964
  Bottom Layer w0.635: v2@33.77,85.508 v2(33.77,89.675) ; v2(223.786,79.236) R21.1@226.568,79.236 ; v2(227.088,81.776) R20.1@228.346,81.776 ; v2(227.342,83.832) R18.1@228.6,83.832 ; R18.1@228.6,83.82 229.362,83.82 229.858,84.316 R19.1@230.378,84.316 ; J1.43@232.311,71.529 J1.43@232.41,71.628
  other v2: 41.88,60.49 45.11,61.35 48.62,61.43 51.47,62.82 43.57,64.01 52.83,65.12 41.81,65.66 30.55,65.69
+5VA: C19_B.2 C20_B.2 C38.1 D7_B.2 D8_B.1 D11.2 L3.2 R26.1 | length 115
  Component Side w0.3: v2(104.14,30.226) 128.778,30.226 131.572,33.02 v2(131.572,35.306)
  Bottom Layer w0.3: D11.2@24.67,26.924 27.972,30.226 v2(104.14,30.226)
  Bottom Layer w0.5: R26.1@125.54,28.32 127.86,30.64
  other v2: 128.524,35.306 130.048,35.306 127,35.814 133.096,35.814 134.874,35.814 127,37.338 133.096,37.338 134.874,37.338 127,38.862 133.096,38.862 134.874,38.862 127,40.386 133.096,40.386 134.874,40.386
+5VA_FILTERED: J1.26 J1.27 J1.58 J1.59 L7.1 | length 10.2
  Component Side w2: J1.58@232.41,33.33 J1.59@232.41,30.79 J1.27@237.49,30.79 J1.26@237.49,33.33
+5VARTN: C19_B.1 C20_B.1 C35.2 C36.2 C37.2 C38.2 C47.2 D8_B.2 L7.3 R30.2 T2_B.7 T2_B.8 T2_B.9 | length 78.8
  Bottom Layer w0.3: R30.2@31.484,24.384 110.236,24.384
  other v2: 109.22,35.052 110.744,35.052 112.268,35.052 114.046,35.052 109.22,36.83 110.744,36.83 112.268,36.83 114.046,36.83 109.22,38.608 110.744,38.608 112.268,38.608 114.046,38.608 110.236,40.132 111.76,40.132 113.538,40.132 115.316,40.132 117.094,40.132 118.872,40.132 120.65,40.132 109.474,41.656 110.998,41.656 112.522,41.656 114.3,41.656 116.078,41.656 117.856,41.656 119.634,41.656 109.982,43.18 111.506,43.18 113.284,43.18 115.062,43.18 116.84,43.18 118.618,43.18 120.396,43.18 122.174,43.18 109.982,44.704 111.506,44.704 113.03,44.704 114.554,44.704 109.982,46.228 111.506,46.228 113.03,46.228 114.554,46.228 109.982,47.752 111.506,47.752 113.03,47.752 114.554,47.752 109.982,49.276 111.506,49.276 113.03,49.276 114.554,49.276 109.982,50.8 111.506,50.8 113.03,50.8 114.554,50.8 109.982,52.324 111.506,52.324 113.03,52.324 114.554,52.324
+5VB: C19_C.2 C20_C.2 C30.2 D7_C.2 D8_C.1 D13.2 L1.2 R24.2 | length 146.7
  Component Side w0.3: D13.2@24.67,39.624 66.04,39.624 73.66,32.004 v2(74.422,32.004) ; v2(106.934,28.956) v2(139.7,28.956)
  Component Side w0.5: 168.88,39.62 R24.2@170.77,39.62
  Bottom Layer w0.3: v2(74.422,32.004) 75.215,31.211 104.548,31.211 106.803,28.956 v2(106.934,28.956) ; v2(139.7,28.956) 156.062,28.956 v2(162.44,35.334)
  other v2: 163.964,35.334 165.488,35.334 160.916,35.842 167.012,35.842 160.916,37.366 167.012,37.366 160.916,38.89 167.012,38.89 168.79,38.89 160.916,40.414 167.012,40.414 168.79,40.414
+5VB_FILTERED: J1.20 J1.21 J1.52 J1.53 L5.4 | length 10.2
  Bottom Layer w2: J1.53@232.41,46.03 J1.52@232.41,48.57 J1.20@237.49,48.57 J1.21@237.49,46.03
+5VBRTN: C19_C.1 C20_C.1 C27.1 C28.1 C29.1 C30.1 C45.2 D8_C.2 L5.2 R33.2 T2_C.7 T2_C.8 T2_C.9 | length 132.7
  Component Side w0.3: R33.2@29.96,35.56 24.892,35.56 23.114,33.782 23.114,30.226 24.638,28.702 39.116,28.702 v2(40.386,27.432) ; v2(105.664,27.432) 143.51,27.432
  Bottom Layer w0.3: v2(40.386,27.432) v2(105.664,27.432)
  other v2: 143.002,35.052 144.526,35.052 146.05,35.052 147.828,35.052 143.002,36.83 144.526,36.83 146.05,36.83 147.828,36.83 143.002,38.608 144.526,38.608 146.05,38.608 147.828,38.608 144.018,40.132 145.542,40.132 147.32,40.132 149.098,40.132 150.876,40.132 152.654,40.132 154.432,40.132 143.256,41.656 144.78,41.656 146.304,41.656 148.082,41.656 149.86,41.656 151.638,41.656 153.416,41.656 143.764,43.18 145.288,43.18 147.066,43.18 148.844,43.18 150.622,43.18 152.4,43.18 154.178,43.18 155.956,43.18 143.764,44.704 145.288,44.704 146.812,44.704 148.336,44.704 143.764,46.228 145.288,46.228 146.812,46.228 148.336,46.228 143.764,47.752 145.288,47.752 146.812,47.752 148.336,47.752 143.764,49.276 145.288,49.276 146.812,49.276 148.336,49.276 143.764,50.8 145.288,50.8 146.812,50.8 148.336,50.8 143.764,52.324 145.288,52.324 146.812,52.324 148.336,52.324
+5VGNDA: J1.28 J1.29 J1.60 J1.61 L7.2 | length 10.2
  Component Side w2: J1.61@232.41,25.71 J1.60@232.41,28.25 J1.28@237.49,28.25 J1.29@237.49,25.71
+5VGNDB: J1.22 J1.23 J1.54 J1.55 L5.3 | length 10.2
  Bottom Layer w2: J1.55@232.41,40.95 J1.54@232.41,43.49 J1.22@237.49,43.49 J1.23@237.49,40.95
+5VRAW: F1.1 J1.2 J1.34 | length 178.4
  Bottom Layer w1.27: F1.1@63.314,104.394 66.845,100.863 225.837,100.863 J1.34@232.41,94.29 J1.2@237.49,94.29
-5VA: C9_A.1 C10_A.1 C44.1 D4_A.2 L4.2 R31.2 R32.2 T1_A.9 T1_A.10 | length 45.5
  Component Side w0.3: R32.2@30.976,30.48 76.454,30.48
  other v1: 76.708,34.29 77.978,34.29 79.248,34.29 80.518,34.29 81.788,34.29 83.058,34.29 76.708,35.56 77.978,35.56 79.248,35.56 80.518,35.56 81.788,35.56 83.058,35.56 76.708,36.83 77.978,36.83 79.248,36.83 80.518,36.83 81.788,36.83 83.058,36.83 76.708,38.1 77.978,38.1 79.248,38.1 80.518,38.1 81.788,38.1 83.058,38.1 76.708,39.37 77.978,39.37 79.248,39.37 80.518,39.37 81.788,39.37 83.058,39.37 76.708,40.64 77.978,40.64 79.248,40.64 80.518,40.64 81.788,40.64 83.058,40.64 76.708,41.91 77.978,41.91 79.248,41.91 80.518,41.91 81.788,41.91 76.708,43.18 77.978,43.18 79.248,43.18 80.518,43.18 81.788,43.18 76.708,44.45 77.978,44.45 79.248,44.45 80.518,44.45 81.788,44.45 76.708,45.72 77.978,45.72 79.248,45.72 80.518,45.72 81.788,45.72 76.708,46.99 77.978,46.99 79.248,46.99 80.518,46.99 81.788,46.99 76.708,48.26 77.978,48.26 79.248,48.26 80.518,48.26 81.788,48.26 76.708,49.53 77.978,49.53 79.248,49.53 80.518,49.53 81.788,49.53 76.708,50.8 77.978,50.8 79.248,50.8 76.708,52.07 77.978,52.07 79.248,52.07 76.708,53.34 77.978,53.34 79.248,53.34
-5VA_FILTERED: J1.31 J1.63 L8.3 | length 14.6
  Component Side w2: L8.3@229.04,18.46 230.54,18.46 232.41,20.33 J1.63@232.41,20.63 J1.31@237.49,20.63
  Bottom Layer w2: J1.63@232.41,20.63 J1.31@237.49,20.63
-5VARTN: C9_A.2 C10_A.2 C41.2 C42.2 C43.2 C44.2 C46.2 D3_A.2 D4_A.1 D12.2 L8.1 | length 77
  Bottom Layer w0.3: D12.2@24.67,33.274 87.96,33.274 97.676,42.99
  other v2: 88.392,33.528 89.916,33.528 91.44,33.528 93.218,33.528 94.996,33.528 96.774,33.528 98.298,33.528 99.822,33.528 101.346,33.528 88.392,35.052 89.916,35.052 91.44,35.052 93.218,35.052 94.996,35.052 96.774,35.052 98.298,35.052 99.822,35.052 101.346,35.052 88.392,36.576 89.916,36.576 91.44,36.576 93.218,36.576 94.996,36.576 96.774,36.576 98.298,36.576 99.822,36.576 101.346,36.576 88.392,38.1 89.916,38.1 91.44,38.1 93.218,38.1 94.996,38.1 96.774,38.1 98.298,38.1 99.822,38.1 101.346,38.1 88.392,39.624 89.916,39.624 91.44,39.624 93.218,39.624 94.996,39.624 96.774,39.624 98.298,39.624 99.822,39.624 101.346,39.624 88.392,41.148 89.916,41.148 91.44,41.148 93.218,41.148 94.996,41.148 96.774,41.148 98.298,41.148 99.822,41.148 101.346,41.148 89.916,42.672 91.44,42.672 93.218,42.672 94.996,42.672 96.774,42.672 98.298,42.672 99.822,42.672 101.346,42.672 88.392,44.196 89.916,44.196 91.44,44.196 98.298,44.196 99.822,44.196 101.346,44.196 98.298,45.72 99.822,45.72 101.346,45.72 98.298,47.244 99.822,47.244 101.346,47.244 89.916,47.752 91.44,47.752 98.298,48.768 99.822,48.768 101.346,48.768
-5VB: C9_D.1 C10_D.1 C34.2 D4_D.2 L2.2 R25.1 R34.2 T1_D.9 T1_D.10 | length 160.6
  Component Side w0.3: R34.2@33.516,43.18 R34.2@33.262,43.434 54.61,43.434 69.85,58.674 105.41,58.674 108.458,61.722 171.196,61.722 179.26,53.658 179.464,53.658
  Bottom Layer w0.5: R25.1@177.07,33.54 177.14,33.54 179.27,35.67
  other v1: 179.832,39.37 181.102,39.37 182.372,39.37 183.642,39.37 184.912,39.37 186.182,39.37 179.832,40.64 181.102,40.64 182.372,40.64 183.642,40.64 184.912,40.64 186.182,40.64 179.832,41.91 181.102,41.91 182.372,41.91 183.642,41.91 184.912,41.91 179.832,43.18 181.102,43.18 182.372,43.18 183.642,43.18 184.912,43.18 179.832,44.45 181.102,44.45 182.372,44.45 183.642,44.45 184.912,44.45 179.832,45.72 181.102,45.72 182.372,45.72 183.642,45.72 184.912,45.72 179.832,46.99 181.102,46.99 182.372,46.99 183.642,46.99 184.912,46.99 179.832,48.26 181.102,48.26 182.372,48.26 183.642,48.26 184.912,48.26 179.832,49.53 181.102,49.53 182.372,49.53 183.642,49.53 184.912,49.53 179.832,50.8 181.102,50.8 182.372,50.8 179.832,52.07 181.102,52.07 182.372,52.07 179.832,53.34 181.102,53.34 182.372,53.34
-5VB_FILTERED: J1.25 J1.57 L6.2 | length 12.6
  Component Side w2: J1.57@232.41,35.87 J1.25@237.49,35.87
  Bottom Layer w2: L6.2@230.01,35.87 J1.25@237.49,35.87
-5VBRTN: C9_D.2 C10_D.2 C31.1 C32.1 C33.1 C34.1 C39.2 D3_D.2 D4_D.1 D14.2 L6.4 | length 184
  Component Side w0.3: D14.2@24.67,45.974 26.194,44.45 53.594,44.45 68.58,59.436 105.41,59.436 108.712,62.738 171.958,62.738 176.098,58.598 187.528,58.598 188.417,57.709 188.417,49.611 C9_D.2@189.704,48.324
  other v2: 191.516,39.624 193.04,39.624 194.564,39.624 196.342,39.624 198.12,39.624 199.898,39.624 201.422,39.624 202.946,39.624 204.47,39.624 191.516,41.148 193.04,41.148 194.564,41.148 196.342,41.148 198.12,41.148 199.898,41.148 201.422,41.148 202.946,41.148 204.47,41.148 193.04,42.672 194.564,42.672 196.342,42.672 198.12,42.672 199.898,42.672 201.422,42.672 202.946,42.672 204.47,42.672 191.516,44.196 193.04,44.196 194.564,44.196 201.422,44.196 202.946,44.196 204.47,44.196 201.422,45.72 202.946,45.72 204.47,45.72 201.422,47.244 202.946,47.244 204.47,47.244 193.04,47.752 194.564,47.752 201.422,48.768 202.946,48.768 204.47,48.768
-5VGNDA: J1.30 J1.62 L8.4 | length 14.4
  Component Side w2: L8.4@229.02,21.11 229.43,21.11 231.49,23.17 J1.62@232.41,23.17 J1.30@237.49,23.17
  Bottom Layer w2: J1.62@232.41,23.17 J1.30@237.49,23.17
-5VGNDB: J1.24 J1.56 L6.1 | length 12.6
  Component Side w2: J1.56@232.41,38.41 J1.24@237.49,38.41
  Bottom Layer w2: L6.1@229.96,38.41 J1.24@237.49,38.41
A0: R1_A.2 U2_A.1 U3.19 | length 52.8
  Component Side w0.3: U3.19@51.21,86.41 52.43,86.41 52.498,86.478 v3(52.884,86.478) ; R1_A.2@92.584,95.314 92.904,94.994 U2_A.1@93.532,94.994 v4@93.532,96.714
  Bottom Layer w0.3: v3@52.88,86.41 54.08,87.61 54.08,92.379 59.261,97.56 92.686,97.56 v4(93.472,96.774)
A1: R6_C.2 U3.23 U3_C.1 | length 108.2
  Component Side w0.3: U3.23@51.438,89.518 v3(52.854,89.518)
  Component Side w0.5: v4(151.13,97.79) 151.184,97.736 U3_C.1@151.184,96.374 ; U3_C.1@151.179,96.315 R6_C.2@152.015,96.315
  Bottom Layer w0.3: v3@52.88,89.52 52.88,92.99 57.95,98.06 114.3,98.06 115.301,97.059 134.698,97.059 134.819,97.18 150.52,97.18 v4(151.13,97.79)
A2: R6_B.2 U3.24 U3_B.1 | length 73
  Component Side w0.3: U3.24@51.444,90.384 v3(51.444,91.148)
  Component Side w0.5: v4(117.094,98.044) 117.268,97.87 U3_B.1@117.268,96.346 ; U3_B.1@117.263,96.287 R6_B.2@118.099,96.287
  Bottom Layer w0.3: v3@51.43,91.15 51.43,92.247 57.743,98.56 116.578,98.56 v4(117.094,98.044)
A3: R1_D.2 U2_D.1 U3.25 | length 152.9
  Component Side w0.3: U3.25@49.83,92.314 v3(50.584,93.068) ; R1_D.2@195.52,94.994 U2_D.1@196.402,94.994 196.088,95.308 v4(196.088,97.028)
  Bottom Layer w0.3: v3@50.63,93.09 56.6,99.06 194.056,99.06 v4(196.088,97.028)
A_NTC: NTC1.2 R29.1 U3.26 | length 136.3
  Component Side w0.3: U3.26@49.04,91.77 49.04,93.86 49.66,94.48 52.95,94.48 56.752,90.678 70.866,90.678 72.898,88.646 v2(72.898,60.452) ; v2(73.66,55.88) 74.422,55.118 v2(104.902,55.118) ; v1(137.414,60.706) 137.414,58.166 139.7,55.88 139.7,55.372 138.43,54.102 v1(137.668,54.102)
  Bottom Layer w0.3: v2(72.898,60.452) 72.898,56.642 v2(73.66,55.88) ; v2(104.902,55.118) 124.714,55.118 125.73,54.102 v1(137.668,54.102) ; v1(137.414,60.706) NTC1.2@138.43,60.706
ADRS0: J1.10 R21.2 U3.9 | length 224.3
  Component Side w0.3: v3@44.24,81.67 U3.9@44.24,83.34
  Bottom Layer w0.3: v3@44.08,81.6 44.08,76.912 58.367,62.625 79.026,62.625 79.47,62.181 79.47,62.126 84.337,57.259 210.857,57.259 218.741,65.143 218.741,75.231 221.488,77.978 227.33,77.978 230.124,75.184 236.728,75.184 J1.10@237.744,74.168
  other v3: 44.06,81.66
ADRS1: J1.9 R20.2 U3.10 | length 223.6
  Component Side w0.3: v3@45.04,81.68 U3.10@45.04,83.34
  Bottom Layer w0.3: v3@44.86,81.63 44.86,76.839 58.574,63.125 79.233,63.125 79.97,62.388 79.97,62.333 84.544,57.759 210.65,57.759 218.241,65.35 218.241,75.438 223.067,80.264 233.426,80.264 J1.9@237.236,76.454
  other v3: 44.92,81.61
ADRS2: J1.8 R19.2 U3.11 | length 223.7
  Component Side w0.3: v3@45.84,81.64 U3.11@45.84,83.34
  Bottom Layer w0.3: v3@45.7,81.54 45.7,76.706 58.781,63.625 79.44,63.625 80.47,62.595 80.47,62.54 84.751,58.259 210.443,58.259 217.741,65.557 217.741,75.645 224.9,82.804 233.68,82.804 J1.8@237.49,78.994
  other v3: 45.76,81.51
ADRS3: J1.7 R18.2 U3.12 | length 223.5
  Component Side w0.3: v3@46.64,81.64 U3.12@46.64,83.34
  Bottom Layer w0.3: v3@46.63,81.66 46.63,76.483 58.988,64.125 79.647,64.125 80.97,62.802 80.97,62.747 84.958,58.759 210.236,58.759 217.241,65.764 217.241,75.852 226.631,85.242 233.782,85.242 J1.7@237.49,81.534
  other v3: 46.664,81.688
AREF: AC1.2 U3.20 | length 1.4
  Component Side w0.3: U3.20@51.24,87.14 AC1.2@52.66,87.14
DIB: B6.2 B8.2 U5.3 | length 9.1
  Component Side w0.635: B6.2@216.81,75.06 218.26,75.06 219.111,74.209 ; B8.2@217.79,72.85 219.111,74.171 219.111,74.209 ; U5.3@223.64,74.209 219.111,74.209
EN1: AR4.2 SSR1.1 U3.32 | length 101.9
  Component Side w0.254: U3.32@44.21,92.24 44.21,92.744 v3(45.054,93.588) ; SSR1.1@130.378,100.813 131.708,100.813 132.385,101.49 v2(132.385,102.337)
  Bottom Layer w0.254: v3@45.09,93.6 52.2,100.71 54.43,100.71 54.66,100.94 60.3,100.94 61.747,102.387 61.747,105.969 63.221,107.442 127.025,107.442 130.886,103.581 131.14,103.581 v2@132.258,102.464
EN2: AR5.2 SSR2.1 U3.1 | length 181.2
  Component Side w0.254: U3.1@42.74,90.41 42.744,90.414 v6(42.744,91.338) ; SSR2.1@205.054,101.117 205.562,101.117 206.68,102.235 v2(206.68,102.337) v2@206.578,102.235
  Bottom Layer w0.254: v6@42.8,91.41 42.8,93.8 50.575,101.575 59.969,101.575 61.293,102.899 61.293,106.157 63.112,107.975 204.089,107.975 206.629,105.435 v2@206.629,102.591
GND: AC1.1 AC2.1 AC3.2 AC4.1 AR4.1 AR5.1 C1.2 C2.2 C3_A.1 C3_D.1 C4_A.1 C4_D.1 C6_A.1 C6_D.1 C7_A.1 C7_D.1 C8_A.1 C8_D.1 C11_A.2 C11_D.2 C12_B.1 C12_C.1 C13_B.1 C13_C.1 C14_B.1 C14_C.1 C15_B.1 C15_C.1 C16_B.1 C16_C.1 C17_B.1 C17_C.1 C21_B.1 C21_C.1 C22_B.1 C22_C.1 C23_B.1 C23_C.1 C24_B.1 C24_C.1 C25.1 C26.1 C39.1 C40.2 C45.1 C46.1 C47.1 DTVS1.2 DTVS2.2 ICSP1.4 ICSP1.6 ICSP1.8 ICSP1.10 J1.3 J1.6 J1.13 J1.19 J1.35 J1.38 J1.44 J1.45 J1.46 J1.47 J1.48 J1.51 LDO1.1 LED1.C LED2.1 LT1_A.4 LT1_D.4 NTC1.1 pad.3 pad.4 R1_A.1 R1_D.1 R5_A.1 R5_D.1 R6_B.1 R6_C.1 R12_B.1 R12_C.1 R14_B.1 R14_C.1 R15_B.2 R15_C.2 R17_B.1 R17_C.1 RESET1.1 Rref1_A.2 Rref1_D.2 SSR1.2 SSR2.2 U2_A.2 U2_D.2 U3.3 U3.5 U3.21 U3_B.2 U3_C.2 U4_B.8 U4_B.9 U4_C.8 U4_C.9 U5.4 U6.4 Y1.2 | length 20.4
  Component Side w0.254: C24_B.1@135.756,86.92 136.8,85.876 v1(136.8,85.61) ; C24_C.1@169.672,86.948 170.71,85.91 v1(170.71,85.79)
  Component Side w0.635: C11_A.2@89.408,80.202 89.408,81.026 v2(89.662,81.28) ; C11_D.2@192.278,80.202 v2(192.278,81.28)
  Component Side w0.8: C24_B.1@135.649,86.295 135.649,85.015 C13_B.1@135.744,85.015 ; C24_C.1@169.565,86.323 169.565,85.043 C13_C.1@169.66,85.043
  Bottom Layer w0.635: 89.662,75.692 v2(89.662,81.28) ; 192.278,75.438 193.04,76.2 193.04,80.518 v2(192.278,81.28)
  other v1: 210.566,54.102 211.582,54.102 212.598,54.102 213.614,54.61 210.566,55.372 211.582,55.372 212.598,55.372 210.566,56.388 211.582,56.388 212.598,56.388 221.996,56.388 223.012,56.388 224.028,56.388 136.906,71.628 137.922,71.628 138.938,71.628 139.954,71.628 140.97,71.628 170.942,71.628 171.958,71.628 172.974,71.628 173.99,71.628 175.006,71.628 129.032,91.44 163.068,91.44 135.89,102.362 136.906,102.362 135.89,103.378 136.906,103.378 83.312,103.632 84.328,103.632 135.89,104.394 136.906,104.394 83.312,104.648 84.328,104.648 83.312,105.664 84.328,105.664
  other v2: 176.784,61.468 82.69,77.534 181.356,83.566 116.84,85.852 150.756,85.88 105.41,96.342 201.422,98.044
LED1: D9.1 U3.14 | length 43.2
  Component Side w0.3: D9.1@24.924,88.392 23.55,87.018 23.55,78.51 28.38,73.68 42.18,73.68 48.24,79.74 U3.14@48.24,83.29